# Altium PCB TestServoCircuit.PcbDoc
Units mm, origin at the board's own origin, x right, y up, seen from the top; angles counter-clockwise.
Board outline 104.14 x 111.76 mm, 2 copper layers (Top Layer, Bottom Layer); 41 components, 21 nets, 125 pads, 20 vias.
Unrouted connection lines stored in the file: 5.
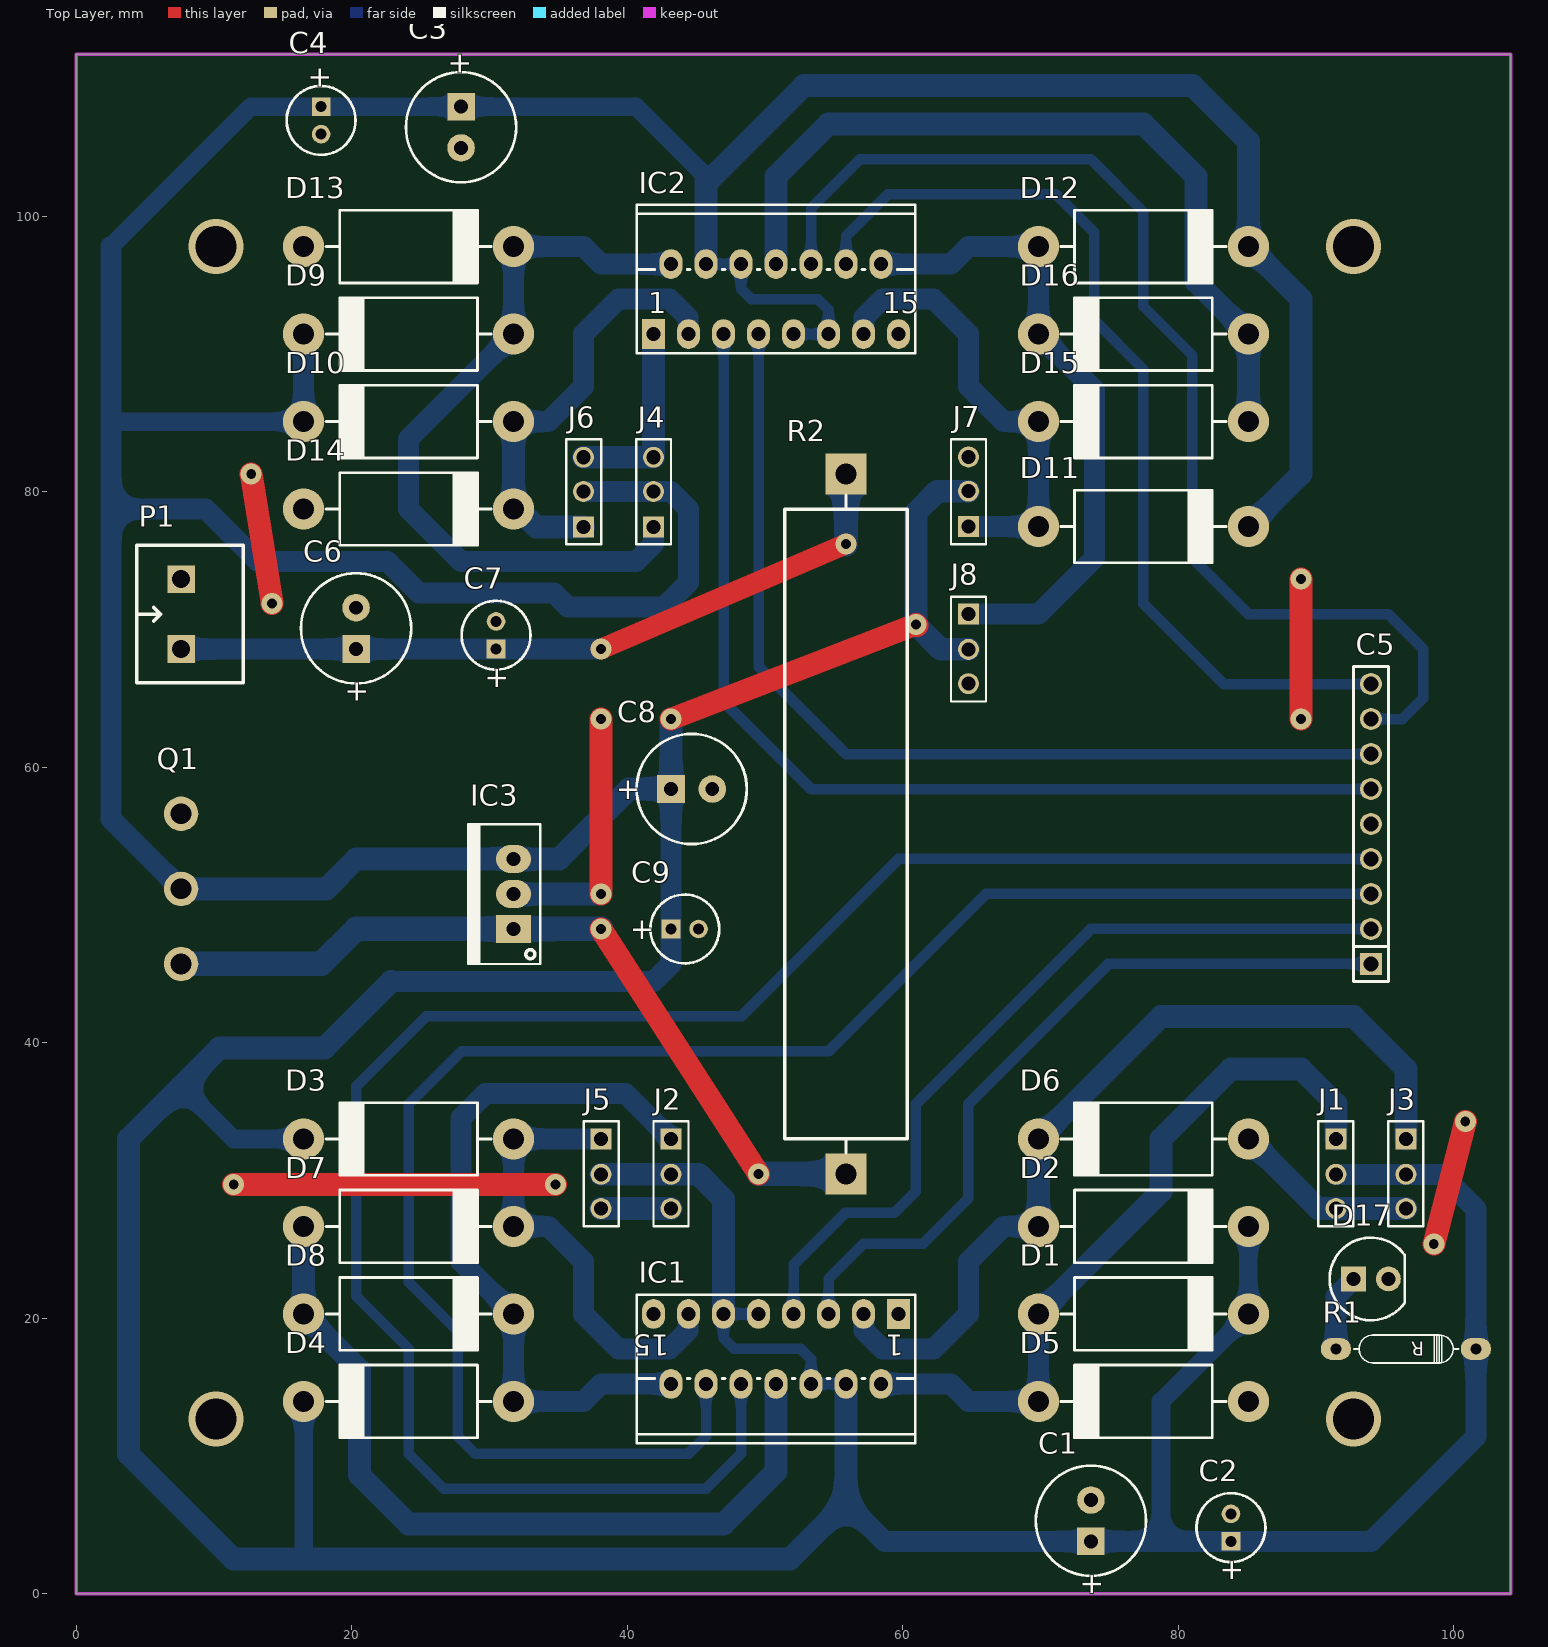
[diagram p0: Top Layer view]
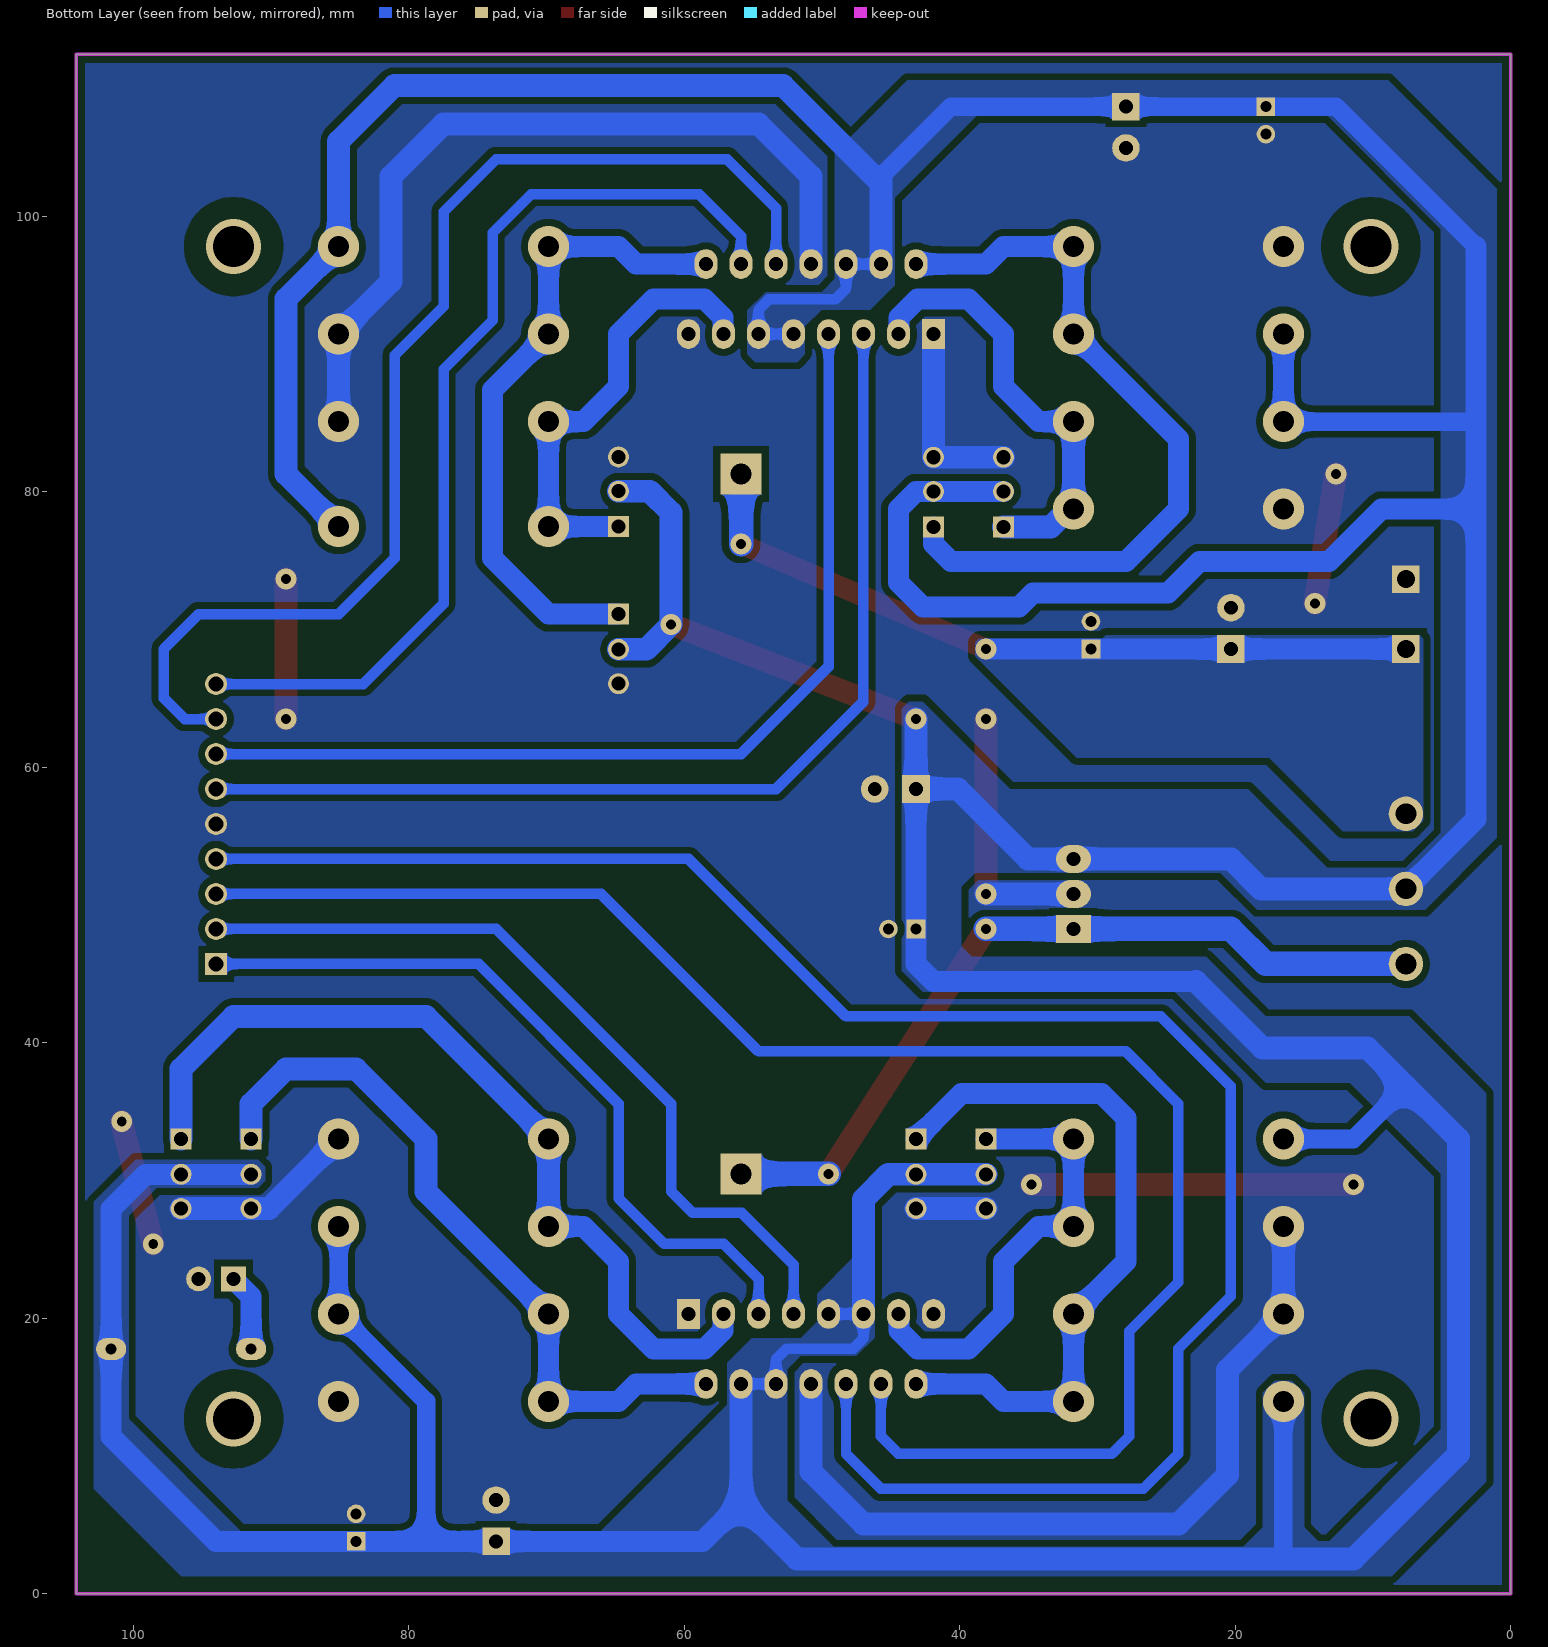
[diagram p1: Bottom Layer view, seen from below]
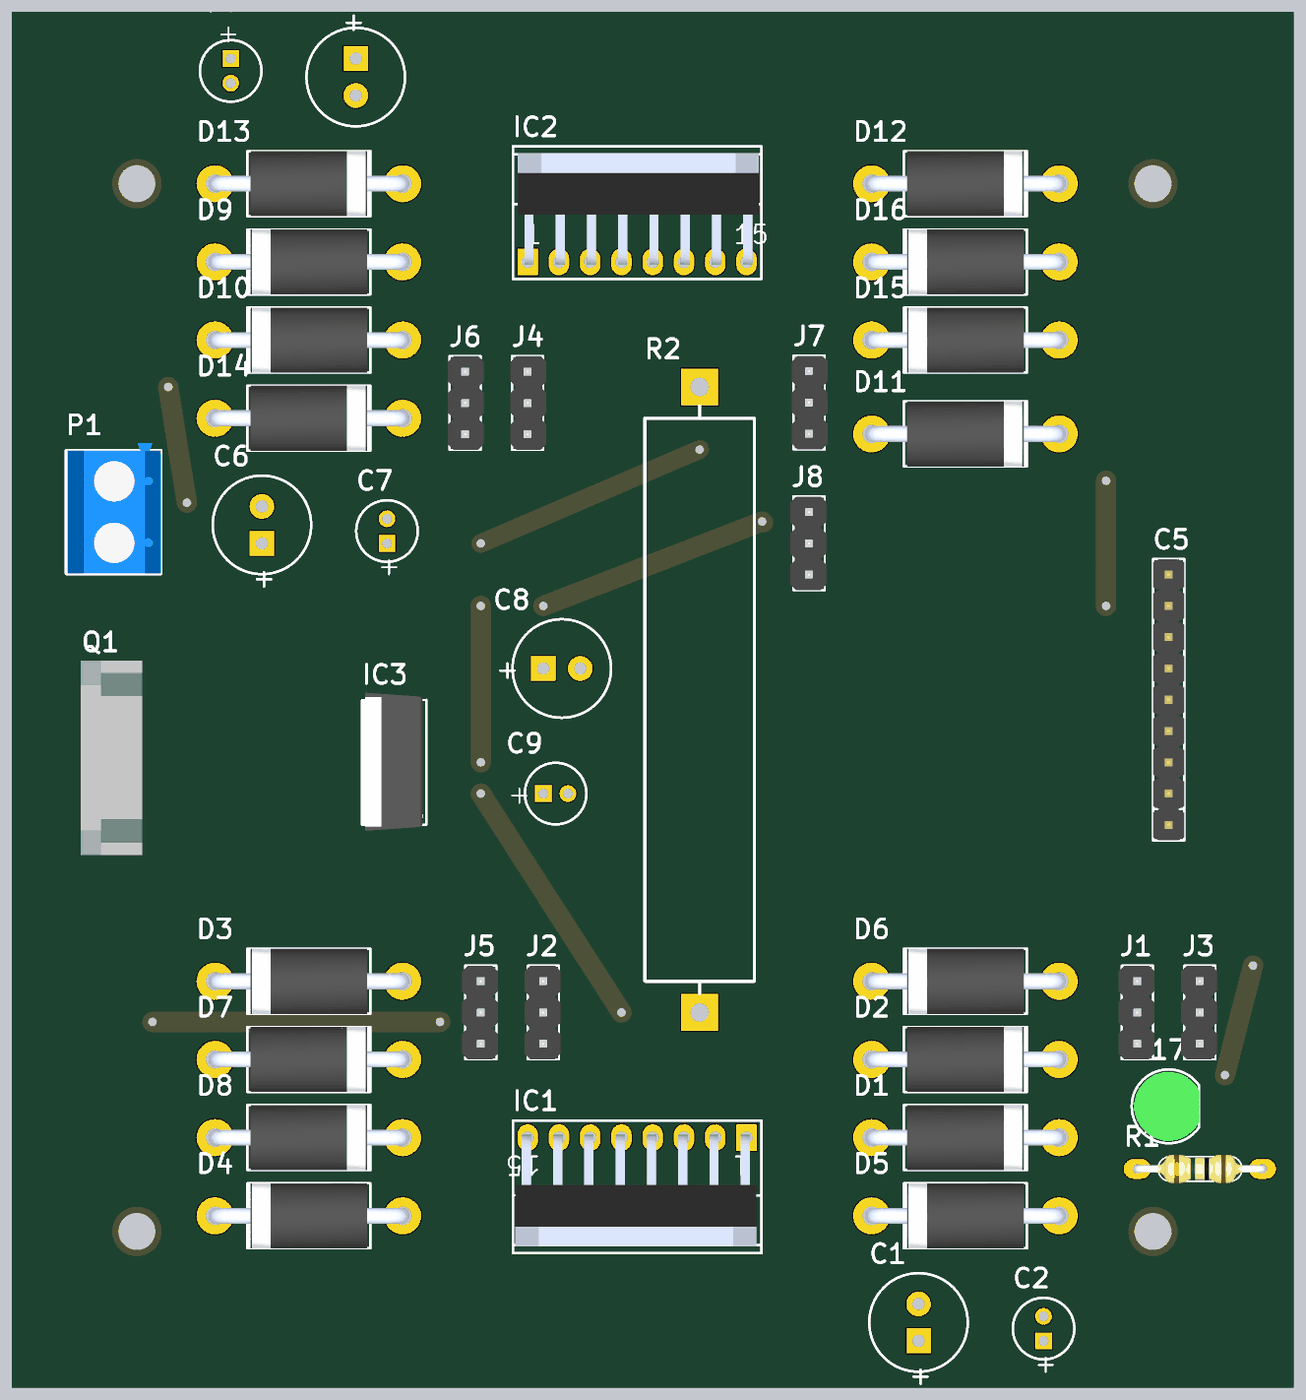
[diagram p2: 3D render of the assembled board from above, using the file's embedded part models]

## Layer stack, top to bottom
Top Solder: solder mask 0.0102, Solder Resist, Dk 3.5
Top Layer: signal copper 0.0356
Dielectric 1: dielectric 0.32, FR-4, Dk 4.8
Bottom Layer: signal copper 0.0356
Bottom Solder: solder mask 0.0102, Solder Resist, Dk 3.5

## Board outline
0,0 0,111.76 104.14,111.76 104.14,0

## Design rules (kind name [scope] priority, off if disabled: settings)
Clearance [All] p1: gap=0.508 ignorepadtopadclearanceinfootprint=FALSE except(0: Arc-Hole Track-Hole SMDPad-Hole THPad-Hole Via-Hole Fill-Hole Poly-Hole Region-Hole Text-Hole)
PolygonConnect [All] p1: connectstyle=Direct reliefconductorwidth=0.254 reliefentries=4 polygonreliefangle="90 Angle" airgapwidth=0.254
RoutingVias [All] p1: holewidth=0.711 width=1.27 viastyle="Through Hole" minholewidth=0.4 minwidth=1.27 maxholewidth=0.711 maxwidth=8.89
SolderMaskExpansion [All] p1: expansion=0.102 istentingtop=FALSE
Width [All] p1: maxlimit=25.4 minlimit=0.254 preferedwidth=0.254
30 further rules are at their usual default settings.

## Components (designator, comment, footprint, x,y, rotation, side; value= is the part's Value field where it differs from the comment)
C1 "Cap Polar" CAPPR3-8x12 73.66,5.31 r90 top value=100uF
C2 "Cap Polar" CAPPR2-5x11 83.82,4.81 r90 top value=0.1uF
C3 "Cap Polar" CAPPR3-8x12 27.94,106.45 r270 top value=100uF
C4 "Cap Polar" CAPPR2-5x11 17.78,106.95 r270 top value=0.1uF
C5 "JP9" JP9-D1T 93.98,45.72 r90 top
C6 "Cap Polar" CAPPR3-8x12 20.32,70.08 r90 top value=100uF
C7 "Cap Polar" CAPPR2-5x11 30.48,69.58 r90 top value=0.1uF
C8 "Cap Polar" CAPPR3-8x12 44.68,58.42 r0 top value=100uF
C9 "Cap Polar" CAPPR2-5x11 44.18,48.26 r0 top value=0.1uF
D1 "1N5401" DIODE/POW/3A 77.47,20.32 r0 top
D2 "1N5401" DIODE/POW/3A 77.47,26.67 r0 top
D3 "1N5401" DIODE/POW/3A 24.13,33.02 r180 top
D4 "1N5401" DIODE/POW/3A 24.13,13.97 r180 top
D5 "1N5401" DIODE/POW/3A 77.47,13.97 r180 top
D6 "1N5401" DIODE/POW/3A 77.47,33.02 r180 top
D7 "1N5401" DIODE/POW/3A 24.13,26.67 r0 top
D8 "1N5401" DIODE/POW/3A 24.13,20.32 r0 top
D9 "1N5401" DIODE/POW/3A 24.13,91.44 r180 top
D10 "1N5401" DIODE/POW/3A 24.13,85.09 r180 top
D11 "1N5401" DIODE/POW/3A 77.47,77.47 r0 top
D12 "1N5401" DIODE/POW/3A 77.47,97.79 r0 top
D13 "1N5401" DIODE/POW/3A 24.13,97.79 r0 top
D14 "1N5401" DIODE/POW/3A 24.13,78.74 r0 top
D15 "1N5401" DIODE/POW/3A 77.47,85.09 r180 top
D16 "1N5401" DIODE/POW/3A 77.47,91.44 r180 top
D17 "LED" LED_5mm 93.98,22.86 r0 top
IC1 "L298" DIP15SL2 50.8,17.78 r180 top
IC2 "L298" DIP15SL2 50.8,93.98 r0 top
IC3 "LM7805" QTO-220 31.75,48.26 r90 top
J1 "Jumper 3" JP3 91.44,30.455 r270 top value=J3
J2 "Jumper 3" JP3 43.18,30.455 r270 top value=J3
J3 "Jumper 3" JP3 96.52,30.455 r270 top value=J3
J4 "Jumper 3" JP3 41.91,80.01 r90 top value=J3
J5 "Jumper 3" JP3 38.1,30.455 r270 top value=J3
J6 "Jumper 3" JP3 36.83,80.01 r90 top value=J3
J7 "Jumper 3" JP3 64.77,80.035 r90 top value=J3
J8 "Jumper 3" JP3 64.77,68.555 r270 top value=J3
P1 "KF301 Domino 2" "Header 2 - M" 7.62,68.58 r90 top
Q1 "BUW42AP" TO-3P 7.62,51.17 r90 top
R1 "R0.4W" "DIEN TRO 1/4 W" 101.6,17.78 r180 top value=500R
R2 "1 Ohm 10W Res Power" "DIEN TRO 10W" 55.88,81.28 r270 top

## Footprints (in the part's own frame and the unit in brackets; to place one, negate y for a bottom-side part, rotate by r counter-clockwise, add the part's x,y. Pads: shape width x height; smd on the part's side, far side on the other; paste and mask are expansions set on the pad)
CAPPR2-5x11 [mm] "Capacitor, Electrolytic, Radial; Body 5 x 11 mm (Dia.xH typ); Pin Spacing 2 mm (typ)"
  rect 1.35x1.35 hole 0.8: 1(-1,0)
  round 1.35 hole 0.8: 2(1,0)
  silkscreen extent -2.5,-2.5 2.5,2.5
CAPPR3-8x12 [mm] "Capacitor, Electrolytic, Radial; Body 8 x 12 mm (Dia.xH typ); Pin Spacing 3 mm (typ)"
  rect 2x2 hole 1: 1(-1.5,0)
  round 2 hole 1: 2(1.5,0)
  silkscreen extent -4,-4 4,4, body extent -3.97,-3.99 4,3.99, height 12
"DIEN TRO 1/4 W" [mm]
  oval 2.2x1.6 hole 0.787: 1(0,0) 2(10.16,0)
  silkscreen extent 1.26,-1.02 8.88,1.02, body extent -0.3,-1.16 10.46,1.16, height 2.93
"DIEN TRO 10W" [mm]
  rect 3x3 hole 1.5: 1(0,0) 2(50.8,0)
  silkscreen extent 1.52,-4.44 49.28,4.45, body extent 2.54,-4.44 48.26,4.45, height 7.62
DIODE/POW/3A [mm]
  round 3 hole 1.5: 1(-7.62,0) 2(7.62,0)
  silkscreen extent -6,-2.64 6,2.64, body extent -8.15,-2.65 8.15,2.65, height 6.3
DIP15SL2 [mil]
  rect 65x85 hole 39.37: 1(-350,-100)
  oval 65x85 hole 39.37: 2(-300,100) 3(-250,-100) 4(-200,100) 5(-150,-100) 6(-100,100) 7(-50,-100) 8(0,100) 9(50,-100) 10(100,100) 11(150,-100) 12(200,100) 13(250,-100) 14(300,100) 15(350,-100)
  silkscreen extent -398,-155 398,269, body extent -382,-110 390,247, height 895
"Header 2 - M" [mm] "Domino 2"
  rect 2x2 hole 1.3 mask+0.1: 1(0,0) 2(5.08,0)
  silkscreen extent -2.46,-4.5 7.54,3.2, body extent -2.46,-4.5 8.14,3.1, height 10.01
JP3 [mm] "Jumper 3"
  rect 1.52x1.52 hole 1.02: 1(-2.565,0)
  round 1.52 hole 1.02: 2(0,0) 3(2.489,0)
  silkscreen extent -3.84,-1.27 3.78,1.27, body extent -3.84,-1.52 3.78,1.4, height 9.02
JP9-D1T [mm] "9 pins, 1 row, straight, gold plating"
  rect 1.6x1.6 hole 1.1: 1(0,0)
  round 1.6 hole 1.1: 2(2.54,0) 3(5.08,0) 4(7.62,0) 5(10.16,0) 6(12.7,0) 7(15.24,0) 8(17.78,0) 9(20.32,0)
  silkscreen extent -1.27,-1.27 21.59,1.27, body extent -1.27,-1.27 21.59,1.27, height 8.54
LED_5mm [mm]
  rect 1.8x1.8 hole 1: 1(-1.27,0)
  round 1.8 hole 1: 2(1.27,0)
  silkscreen extent -3,-3 2.45,3, body extent -2.8,-2.8 2.5,2.8, height 8.8
QTO-220 [mil] "TO-220 - 1-2-3"
  rect 80x100 hole 39: 1(0,0)
  oval 80x100 hole 39: 2(100,0) 3(200,0)
  silkscreen extent -100,-76 300,130, body extent -119,-64 322,121, height 755
TO-3P [mm]
  round 2.5 hole 1.5: 1(-5.45,0) 2(0,0) 3(5.45,0)
  body extent -7.9,-2.97 7.9,2.03, height 23.61

## Part data
C1 C2 C3 C4 C6 C7 C8 C9: "Polarized Capacitor", LatestRevisionDate=17-Jul-2002, LatestRevisionNote="Re-released for DXP Platform.", PackageReference=POLAR0.8, Published=8-Jun-2000, Publisher="Altium Limited"
C5: "WR-PHD 2.54 mm Angled Socket Header", Manufacturer="W¨¹rth Elektronik eiSos GmbH", partNo=613009143121, ComponentLink1 Description=Manufacturer, ComponentLink1URL=http://www.we-online.com, ComponentLink2 Description=Datasheet, ComponentLink2URL=http://katalog.we-online.de/em/datasheet/6130xx143121.pdf, Created by="Karrer Zheng", Created Date="29 March 2013", NoPins=09
D1 D2 D3 D4 D5 D6 D7 D8 D9 D10 D11 D12 D13 D14 D15 D16: library part Diode, "Default Diode", Code_JEDEC=DO-214-AB, LatestRevisionDate=17-Jul-2002, LatestRevisionNote="Re-released for DXP Platform.", PackageReference=SMC, PackageVersion=Sep-1996, Published=8-Jun-2000, Publisher="Altium Limited"
D17: "Typical INFRARED GaAs LED", LatestRevisionDate=08-Jul-2005, LatestRevisionNote="Mech Layer 1 removed.", PackageReference=LED-0, Published=8-Jun-2000, Publisher="Altium Limited"
IC1 IC2: "Dual Full-H Driver", ComponentLink1Description="Manufacturer Link", ComponentLink1URL=http://www.ti.com/, DatasheetVersion=Jun-1990, Note="The tab is elec is connected to GND pin", PackageDescription="TO, Thru-Hole, Vertical, Heatsink Mounted; 15 Bent Staggered Leads; Pitch 1.27 mm", PackageReference=KV015, Published=15-May-2002, Publisher="Altium Limited"
IC3: library part LM78xx, "On ap +, from + 5 to + 24VDC"
J1 J2 J3 J4 J5 J6 J7 J8: library part JP3
P1: library part "HEADER 2 - M", "TERM BLOCK PLUG 2POS 5MM", Color=Blue, Current=10A, Manufacturer="On-Shore Technology", Manufacturer Part Number=KF301, Max Operating Temperature=105°C, Min Operating Temperature=-30°C, Voltage=300V, Category="Terminal Blocks", ComponentLink1Description=http://www.on-shore.com/wp-content/uploads/2015/09/ed130ds.pdf?src-supplier=Digi-Key, ComponentLink1URL=http://www.on-shore.com/wp-content/uploads/2015/09/ed130ds.pdf?src-supplier=Digi-Key, Contact Plating=Tin, Height=10mm, Housing Color=Blue, Length=7.7MM, Mount="Free Hanging", Number of Levels=1, Number of Pins=2, Number of Positions=2, Number of Positions Per Level=2, Number of Rows=1, Packaging=Bulk, Pitch=0.197inch, RoHS=No, Series=KF301, Stock 1=2267, Supplier 1=Digi-Key, Termination=Screw, Width=10MM, Wire Gauge (Max)=22AWG, Wire Gauge (Min)=14AWG
Q1: library part PNP_BCE
R1: library part "Res 1/4 W", "Resistor", LatestRevisionDate=17-Jul-2002, LatestRevisionNote="Re-released for DXP Platform.", PackageReference=AXIAL-0.4, Published=8-Jun-2000, Publisher="Altium Limited"
R2: library part "Res 10 W", "10W Res Power", Creator="Nguyen Ba Bien"

## Via types
v1: diameter 1.5, hole 0.7, Top Layer to Bottom Layer, tented both sides, 16 vias
v2: diameter 4, hole 3, Top Layer to Bottom Layer, 4 vias

## Nets (pads, with @x,y where several pads share a name; then routed paths per layer and width w, separated by ;. In a path a pad name is that pad's centre, name@x,y a point inside that pad or via, vN(x,y) a via of type N, cw(c..) or ccw(c..) an arc to the next point about the centre after c; other vN are vias at no path point)
+5: C1.1 C2.1 C3.1 C4.1 C8.1 C9.1 D1.2 D2.2 D3.2 D4.2 D9.2 D10.2 D11.2 D12.2 IC1.4 IC1.6 IC1.9 IC1.11 IC2.4 IC2.6 IC2.9 IC2.11 IC3.3 J1.2 J2.2 J3.2 J4.2 J5.2 J6.2 J7.2 J8.2 Q1.2 R1.1 | length 659.1
  Top Layer w1.651: v1(43.18,63.5) v1(60.96,70.358) v1@61.032,70.286
  Bottom Layer w0.762: IC2.4 IC2.6 48.26,94.742 49.053,93.949 53.879,93.949 54.61,93.218 IC2.11 IC2.9 ; IC1.9 IC1.11 46.99,18.542 47.721,17.811 52.547,17.811 53.34,17.018 IC1.6 IC1.4
  Bottom Layer w1.35: 2.54,85.09 D10.2 ; 2.54,97.79 12.7,107.95 C4.1 C3.1 40.64,107.95 45.72,102.87 ; 7.62,36.83 11.43,33.02 D3.2 ; 16.51,2.54 D4.2 ; 78.74,3.81 78.74,13.97 D1.2 D2.2
  Bottom Layer w1.524: 2.54,97.79 2.54,85.09 2.54,78.74 ; Q1.2 2.54,56.25 2.54,78.74 ; D10.2 D9.2 ; 22.86,44.45 41.91,44.45 43.18,45.72 C9.1 C8.1 ; J6.2 J4.2 43.18,80.01 44.45,78.74 44.45,73.406 42.672,71.628 35.687,71.628 34.671,72.644 24.892,72.644 22.606,74.93 13.208,74.93 9.398,78.74 2.54,78.74 ; 55.88,6.604 58.674,3.81 C1.1 78.74,3.81 C2.1 93.98,3.81 101.6,11.43 101.6,27.94 99.085,30.455 J3.2 J1.2
  Bottom Layer w1.651: Q1.2 18.15,51.17 20.32,53.34 35.052,53.34 40.132,58.42 C8.1 v1(43.18,63.5) ; 22.86,44.45 18.034,39.624 10.414,39.624 7.62,36.83 3.81,33.02 3.81,10.16 11.43,2.54 16.51,2.54 51.816,2.54 55.88,6.604 IC1.4 ; J5.2 J2.2 45.187,30.455 46.99,28.651 IC1.11 ; IC2.4 45.72,102.87 ; 45.72,102.362 52.832,109.474 81.026,109.474 85.09,105.41 D12.2 88.9,93.98 88.9,81.28 D11.2 ; J8.2 62.763,68.555 v1(60.96,70.358) 60.96,78.486 62.509,80.035 J7.2
GND: C1.2 C2.2 C3.2 C4.2 C5.5 C6.2 C7.2 C8.2 C9.2 D5.1 D6.1 D7.1 D8.1 D13.1 D14.1 D15.1 D16.1 D17.2 IC1.1 IC1.8 IC1.15 IC2.1 IC2.8 IC2.15 IC3.2 J1.3 J2.3 J3.3 J4.3 J5.3 J6.3 J7.3 J8.3 P1.2 | length 222.6
  Top Layer w1.651: v1(11.43,29.718) v1(34.798,29.718) ; v1(12.7,81.28) v1(14.224,71.882) ; v1(38.1,50.8) v1(38.1,63.5) ; v1(88.9,63.5) v1(88.9,73.66) ; v1(98.552,25.4) v1(100.838,34.29)
  Bottom Layer w1.651: D7.1 D8.1 20.574,16.256 20.574,8.636 24.13,5.08 46.99,5.08 50.8,8.89 IC1.8 ; IC3.2 v1(38.1,50.8) ; J6.3 J4.3 IC2.1 ; J5.3 J2.3 ; IC2.8 50.8,102.87 54.61,106.68 77.47,106.68 81.28,102.87 81.28,95.25 D16.1 D15.1 ; D6.1 90.145,27.965 J1.3 J3.3
IN1: C5.1 IC1.5 | length 55.4
  Bottom Layer w0.762: IC1.5 54.61,22.86 57.15,25.4 61.468,25.4 64.77,28.702 64.77,35.56 74.93,45.72 C5.1
IN2: C5.2 IC1.7 | length 59.3
  Bottom Layer w0.762: IC1.7 52.07,23.876 55.841,27.647 59.397,27.647 60.96,29.21 60.96,35.56 73.66,48.26 C5.2
IN3: C5.4 IC1.10 | length 140.1
  Bottom Layer w0.762: IC1.10 48.26,10.16 45.72,7.62 26.67,7.62 24.13,10.16 24.13,17.78 20.32,21.59 20.32,36.83 25.4,41.91 48.26,41.91 59.69,53.34 C5.4
IN4: C5.3 IC1.12 | length 124.7
  Bottom Layer w0.762: IC1.12 45.72,11.43 44.45,10.16 28.956,10.16 28.195,10.921 27.686,11.43 27.686,19.05 24.13,22.606 24.13,35.56 27.94,39.37 54.61,39.37 66.04,50.8 C5.3
IN5: C5.6 IC2.5 | length 76.3
  Bottom Layer w0.762: IC2.5 46.99,64.77 53.34,58.42 C5.6
IN6: C5.7 IC2.7 | length 71.2
  Bottom Layer w0.762: IC2.7 49.53,67.31 55.88,60.96 C5.7
IN7: C5.8 IC2.10 | length 85.4
  Bottom Layer w0.762: IC2.10 53.34,100.584 56.896,104.14 73.66,104.14 77.47,100.33 77.47,93.472 81.026,89.916 81.026,75.184 85.09,71.12 95.25,71.12 97.79,68.58 97.79,65.024 96.266,63.5 C5.8
IN8: C5.9 IC2.12 | length 69.8
  Bottom Layer w0.762: IC2.12 55.88,98.552 58.928,101.6 71.12,101.6 73.914,98.806 73.914,92.456 77.47,88.9 77.47,71.882 83.312,66.04 C5.9
NetD17_1: D17.1 R1.2 | length 5.6
  Bottom Layer w1.524: R1.2 91.44,21.59 D17.1
NetIC3_1: IC3.1 Q1.1 R2.2 | length 59
  Top Layer w1.651: v1(38.1,48.26) v1(49.53,30.48)
  Bottom Layer w1.778: Q1.1 17.78,45.72 20.32,48.26 IC3.1 v1(38.1,48.26) ; v1(49.53,30.48) R2.2
SERVO1: D1.1 D5.2 IC1.2 J1.1 | length 53.1
  Bottom Layer w1.524: IC1.2 63.5,15.24 64.77,13.97 D5.2 D1.1
  Bottom Layer w1.651: D1.1 78.74,29.21 78.74,33.02 83.82,38.1 88.9,38.1 91.44,35.56 J1.1
SERVO2: D2.1 D6.2 IC1.3 J3.1 | length 63.7
  Bottom Layer w1.524: IC1.3 57.174,20.296 57.174,19.135 58.529,17.78 62.23,17.78 64.77,20.32 64.77,24.13 67.31,26.67 D2.1
  Bottom Layer w1.651: D2.1 D6.2 78.74,41.91 92.71,41.91 96.52,38.1 J3.1
SERVO3: D3.1 D7.2 IC1.13 J5.1 | length 33
  Bottom Layer w1.524: J5.1 D3.1 D7.2 34.29,26.67 36.83,24.13 36.83,20.32 39.37,17.78 43.071,17.78 44.426,19.135 44.426,20.296 IC1.13
SERVO4: D4.1 D8.2 IC1.14 J2.1 | length 51.5
  Bottom Layer w1.524: IC1.14 38.1,15.24 36.83,13.97 D4.1 D8.2 27.94,24.13 27.94,34.544 29.718,36.322 39.878,36.322 J2.1
SERVO5: D9.1 D13.2 IC2.2 J4.1 | length 55.3
  Bottom Layer w1.524: J4.1 41.91,76.2 40.64,74.93 27.94,74.93 24.13,78.74 24.13,83.82 D9.1 D13.2 36.83,97.79 38.1,96.52 IC2.2
SERVO6: D10.1 D14.2 IC2.3 J6.1 | length 32.3
  Bottom Layer w1.524: D10.1 34.29,85.09 36.83,87.63 36.83,91.44 39.37,93.98 43.071,93.98 44.426,92.625 44.426,91.464 IC2.3
  Bottom Layer w1.651: D10.1 D14.2 32.096,78.74 33.392,77.445 J6.1
SERVO7: D11.1 D15.2 IC2.13 J7.1 | length 31.8
  Bottom Layer w1.524: IC2.13 57.174,91.464 57.174,92.625 58.529,93.98 62.23,93.98 64.77,91.44 64.77,87.63 67.31,85.09 D15.2 D11.1@69.85,78.74 ; J7.1 D11.1
SERVO8: D12.1 D16.2 IC2.14 J8.1 | length 47.1
  Bottom Layer w1.524: IC2.14 63.5,96.52 64.77,97.79 D12.1 D16.2 73.914,87.376 73.914,75.184 69.85,71.12 J8.1
VCC: C6.1 C7.1 P1.1 Q1.3 R2.1 | length 54.9
  Top Layer w1.524: v1(38.1,68.58) v1(55.88,76.2)
  Bottom Layer w1.524: P1.1 C6.1 C7.1 v1(38.1,68.58)
  Bottom Layer w1.778: v1(55.88,76.2) R2.1
copper on no net:
  other v2: 10.16,12.7 92.71,12.7 10.16,97.79 92.71,97.79

## Polygon pours and split planes (outlines as drawn)
GND on Bottom Layer "GND_L02_P012" (solid, remove dead copper, pour order 12): 0,0 0,111.76 104.14,111.76 104.14,0
+5 on Bottom Layer "+5_L02_P009" (solid, pour order 9): 12.319,3.81 14.605,3.81 14.605,3.302 13.843,2.54 13.589,2.54
+5 on Bottom Layer "+5_L02_P010" (solid, remove dead copper, pour order 10): 17.105,109.855 43.815,109.855 49.086,104.584 49.086,98.044 44.704,98.044 44.704,101.346 38.775,107.275 17.105,107.275 17.105,109.855
+5 on Bottom Layer "+5_L02_P008" (solid, remove dead copper, pour order 8): 17.78,41.91 7.366,41.91 1.778,36.322 1.778,8.128 8.636,1.27 96.52,1.27 102.87,7.62 102.87,28.448 99.822,31.496 90.932,31.496 90.424,30.988 90.424,29.972 90.932,29.464 98.298,29.464 100.33,27.432 100.33,12.7 92.115,4.485 66.127,4.485 56.896,13.716 52.514,13.716 52.514,6.794 49.149,3.429 19.431,3.429 18.008,4.852 18.008,14.587 17.126,15.47 15.89,15.47 15.01,14.59 15.01,4.85 13.589,3.429 5.08,11.938 5.08,30.48 11.684,37.084 17.78,37.084
+5 on Bottom Layer "+5_L02_P007" (solid, pour order 7): 7.62,49.657 18.415,49.657 21.082,52.324 38.862,52.324 39.878,51.308 39.878,46.99 39.116,46.228 22.098,46.228 17.78,41.91 17.78,37.084 24.384,43.688 42.672,43.688 44.196,45.212 44.196,64.262 43.688,64.77 42.672,64.77 36.322,58.42 19.05,58.42 13.335,52.705 7.62,52.705
VCC on Bottom Layer "VCC_L02_P006" (solid, remove dead copper, pour order 6): 29.972,60.706 17.526,60.706 12.191,55.371 7.107,55.371 6.37,56.108 6.37,69.33 6.62,69.58 29.409,69.58 29.972,69.017
VCC on Bottom Layer "VCC_L02_P005" (solid, pour order 5): 29.972,60.706 31.496,60.706 38.862,68.072 38.862,69.088 38.608,69.342 29.972,69.342
+5 on Bottom Layer "+5_L02_P000" (solid, remove dead copper, pour order 0): 13.295,107.275 5.08,99.06 5.08,55.245 7.62,52.705 7.62,49.657 6.223,49.657 1.016,54.864 1.016,101.981 8.89,109.855 17.105,109.855 17.105,107.275
+5 on Bottom Layer "+5_L02_P003" (solid, remove dead copper, pour order 3): 56.896,16.764 55.118,18.542 51.562,18.542 50.355,19.749 50.355,21.781 47.752,24.384 46.99,24.384 46.164,23.558 46.165,18.606 47.498,17.272 51.562,17.272 52.515,16.32 52.514,13.716 56.896,13.716
+5 on Bottom Layer "+5_L02_P002" (solid, remove dead copper, pour order 2): 44.704,94.996 46.482,93.218 50.038,93.218 51.245,92.011 51.245,89.979 51.816,89.408 54.864,89.408 55.435,89.98 55.435,93.154 54.102,94.488 50.038,94.488 49.085,95.44 49.086,98.044 44.704,98.044

## Keep-outs
Keep-Out Layer:
  the board outline again, w0.254

## Other copper
Bottom Layer:
  pour cut-out: 95.25,95.25 ccw(c92.71,97.79) 95.25,100.33 ccw(c92.71,97.79) 90.17,100.33 ccw(c92.71,97.79) 90.17,95.25 ccw(c92.71,97.79)
  pour cut-out: 95.25,10.16 ccw(c92.71,12.7) 95.25,15.24 ccw(c92.71,12.7) 90.17,15.24 ccw(c92.71,12.7) 90.17,10.16 ccw(c92.71,12.7)
  pour cut-out: 12.7,10.16 ccw(c10.16,12.7) 12.7,15.24 ccw(c10.16,12.7) 7.62,15.24 ccw(c10.16,12.7) 7.62,10.16 ccw(c10.16,12.7)
  pour cut-out: 12.7,95.25 ccw(c10.16,97.79) 12.7,100.33 ccw(c10.16,97.79) 7.62,100.33 ccw(c10.16,97.79) 7.62,95.25 ccw(c10.16,97.79)

## Text inside footprints (layer, text, board x,y; h text height)
C1: Top Overlay "+" at 74.41,-0.165 h1.5 r90
C2: Top Overlay "+" at 84.57,0.835 h1.5 r90
C3: Top Overlay "+" at 27.19,111.925 h1.5 r270
C4: Top Overlay "+" at 17.03,110.925 h1.5 r270
C6: Top Overlay "+" at 21.07,64.605 h1.5 r90
C7: Top Overlay "+" at 31.23,65.605 h1.5 r90
C8: Top Overlay "+" at 39.205,57.67 h1.5
C9: Top Overlay "+" at 40.205,47.51 h1.5
IC1: Top Overlay "15" at 43.053,18.796 h1.5 r180; Top Overlay "1" at 60.071,18.796 h1.5 r180
IC2: Top Overlay "15" at 58.547,92.964 h1.5; Top Overlay "1" at 41.529,92.964 h1.5
R1: Top Overlay "R" at 97.853,18.301 h1 r180